# Altium PCB DB4100_DRV_v0.2.PcbDoc
Units mil, origin at the board's own origin, x right, y up, seen from the top; angles counter-clockwise.
Board outline 5511.81 x 8267.72 mil, 2 copper layers (Top Layer, Bottom Layer); 14 components, 75 nets, 42 pads, 2 vias.
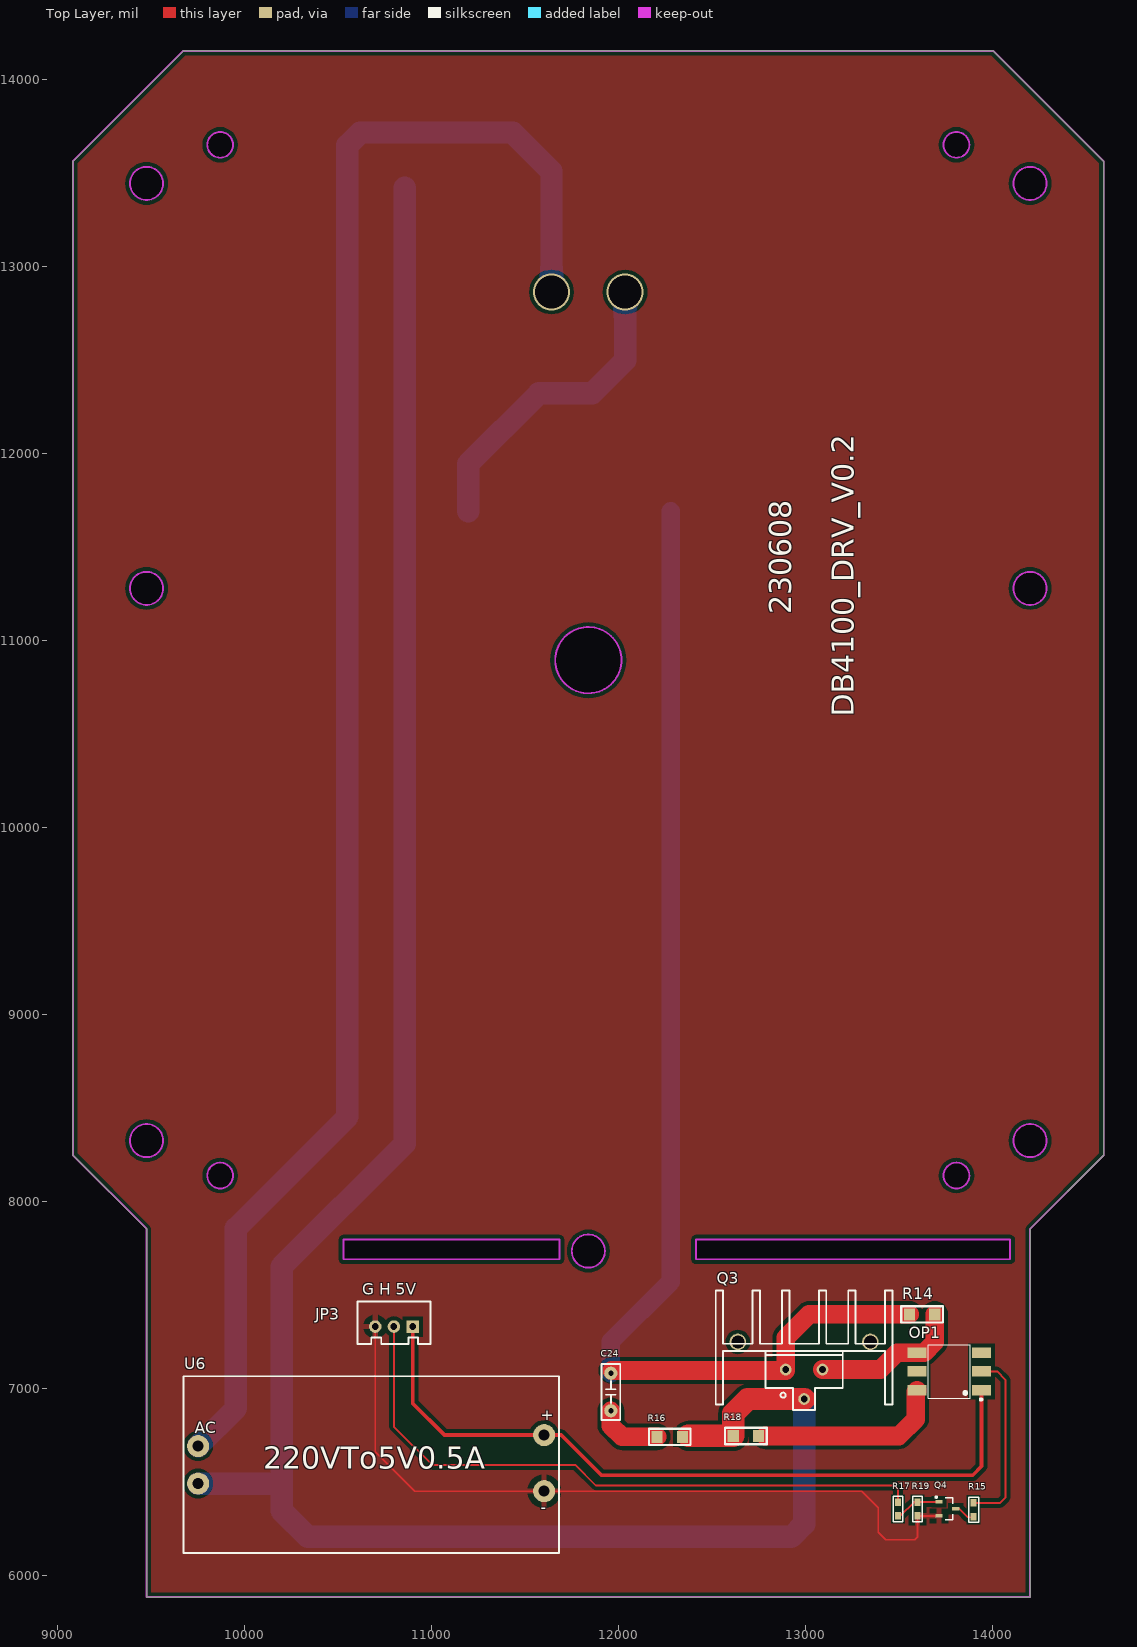
[diagram p0: Top Layer view]
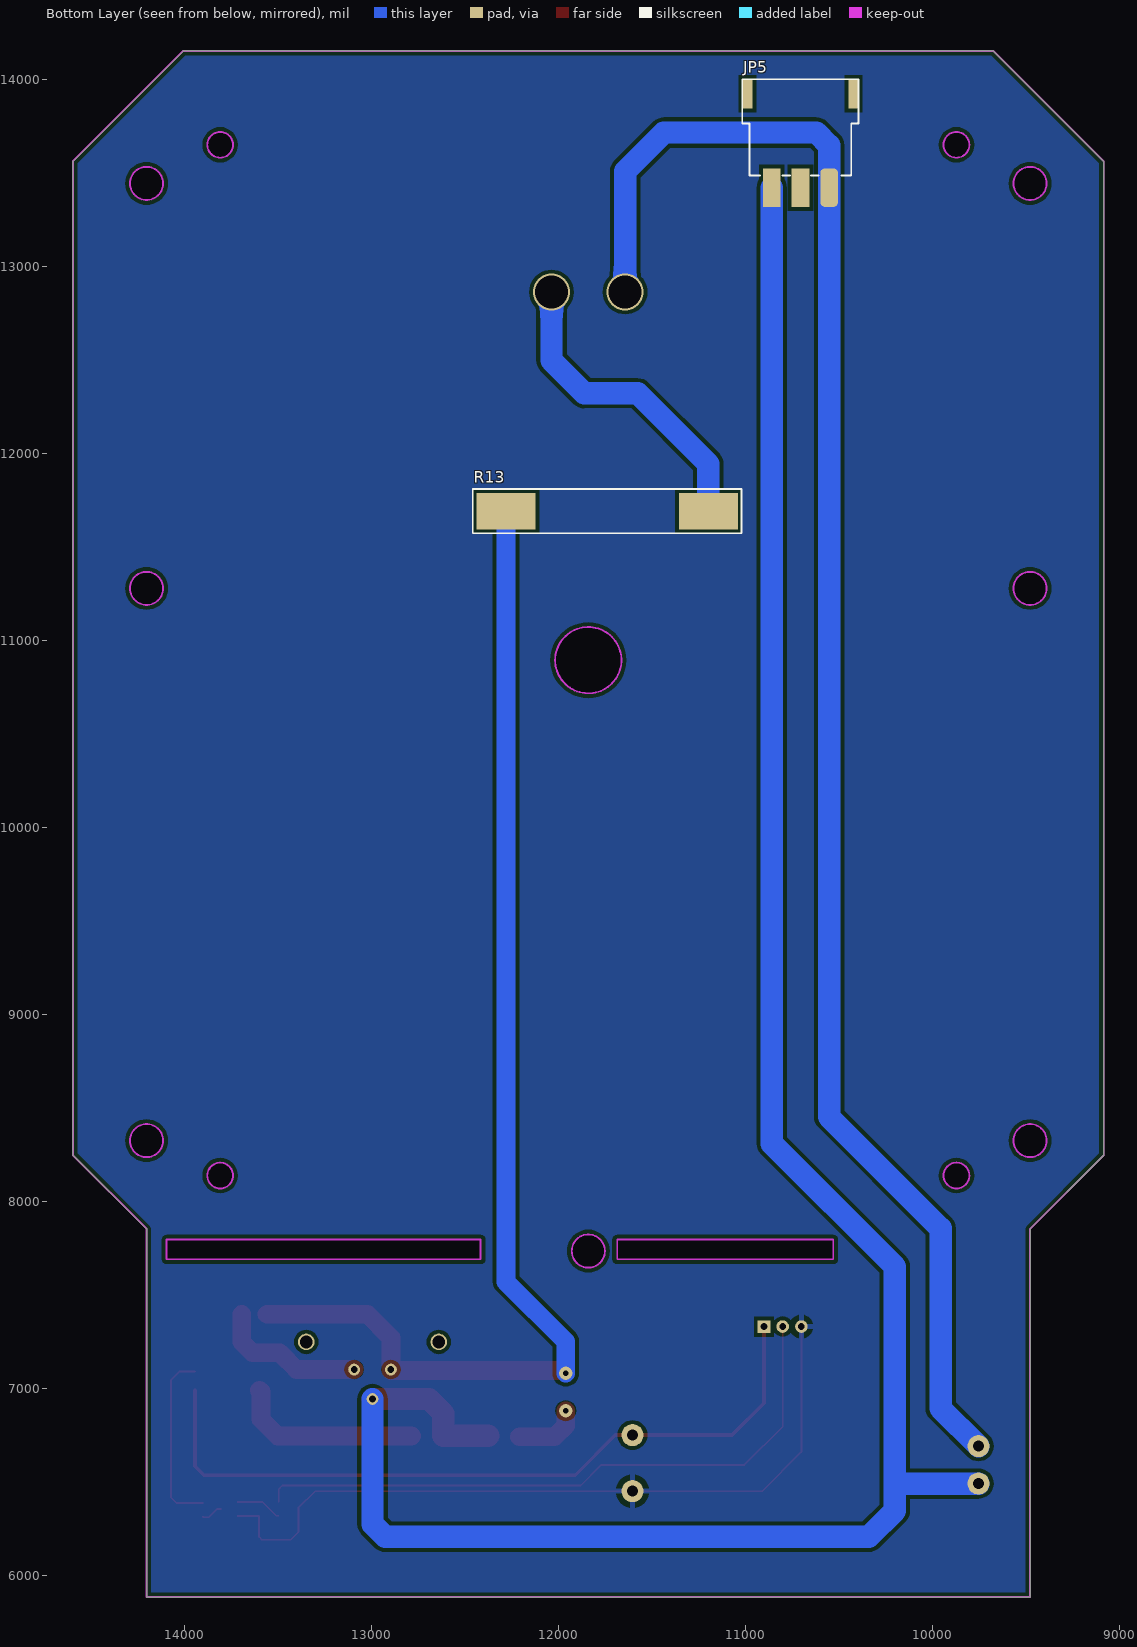
[diagram p1: Bottom Layer view, seen from below]
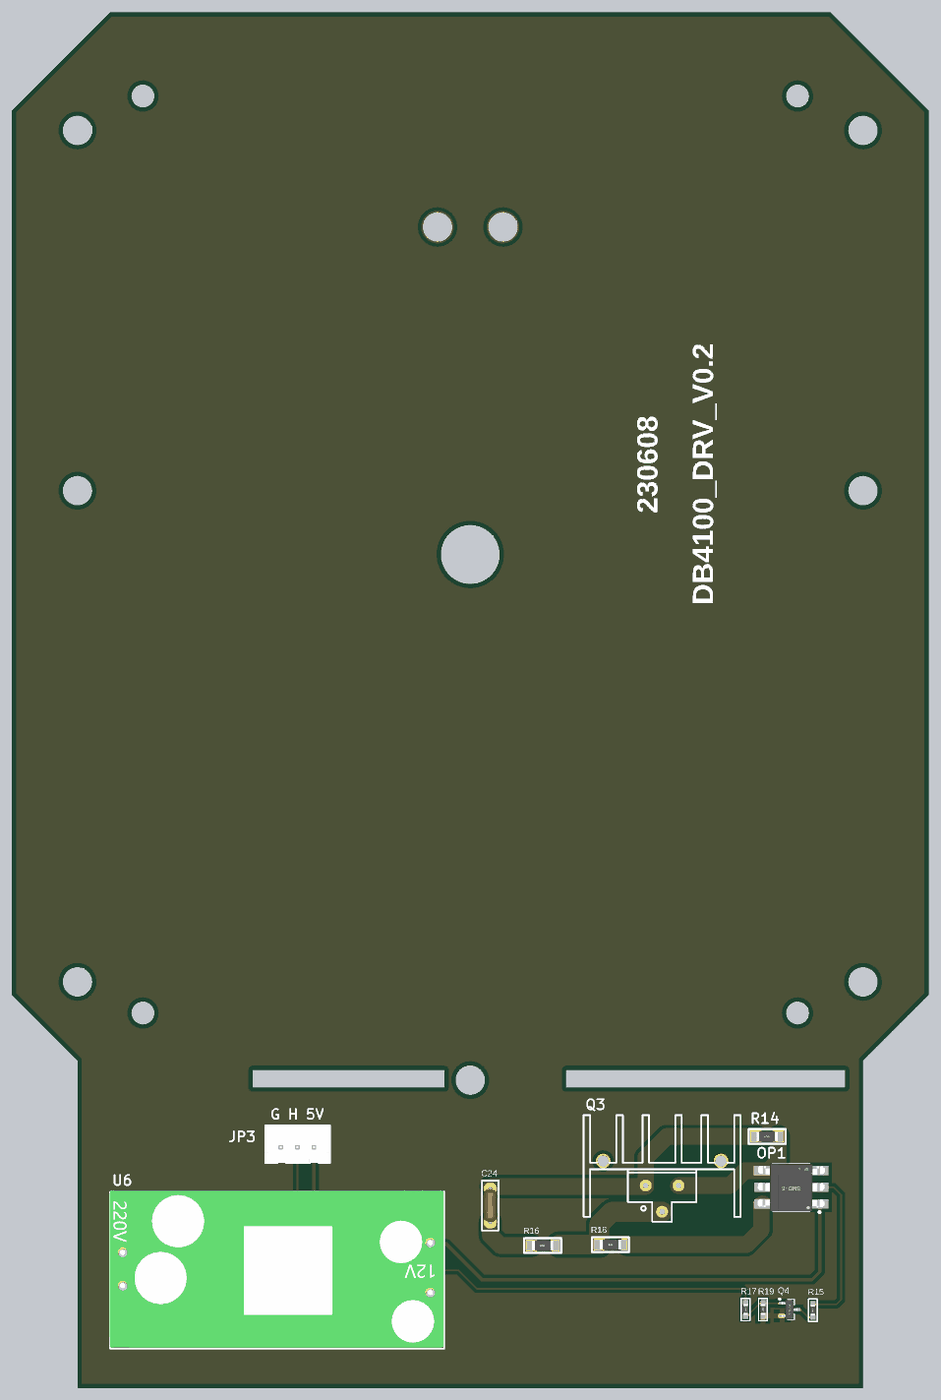
[diagram p2: 3D render of the assembled board from above, using the file's embedded part models]

## Layer stack, top to bottom
Top Solder: solder mask 0.4, Solder Resist, Dk 3.5
Top Layer: signal copper 1.4
Dielectric 1: dielectric 12.6, FR-4, Dk 4.8
Bottom Layer: signal copper 1.4
Bottom Solder: solder mask 0.4, Solder Resist, Dk 3.5

## Board outline
9477.26,5883.42 9477.26,7851.92 9083.56,8245.62 9083.56,13560.58 9674.11,14151.13 14004.82,14151.13 14595.37,13560.58 14595.37,8245.62 14201.67,7851.92 14201.67,5883.42
cut-out: 14113.09,8324.36 ccw(c14201.67,8324.36) 14201.67,8235.78 ccw(c14201.67,8324.36) 14290.25,8324.36 ccw(c14201.67,8324.36) 14201.67,8412.95 ccw(c14201.67,8324.36)
cut-out: 13739.07,8137.36 ccw(c13807.97,8137.36) 13807.97,8068.46 ccw(c13807.97,8137.36) 13876.86,8137.36 ccw(c13807.97,8137.36) 13807.97,8206.25 ccw(c13807.97,8137.36)
cut-out: 11750.88,7733.81 ccw(c11839.46,7733.81) 11839.46,7645.23 ccw(c11839.46,7733.81) 11928.05,7733.81 ccw(c11839.46,7733.81) 11839.46,7822.39 ccw(c11839.46,7733.81)
cut-out: 9802.06,8137.36 ccw(c9870.96,8137.36) 9870.96,8068.46 ccw(c9870.96,8137.36) 9939.86,8137.36 ccw(c9870.96,8137.36) 9870.96,8206.25 ccw(c9870.96,8137.36)
cut-out: 11662.3,10893.26 ccw(c11839.46,10893.26) 11839.46,10716.1 ccw(c11839.46,10893.26) 12016.63,10893.26 ccw(c11839.46,10893.26) 11839.46,11070.43 ccw(c11839.46,10893.26)
cut-out: 14113.09,11277.12 ccw(c14201.67,11277.12) 14201.67,11188.54 ccw(c14201.67,11277.12) 14290.25,11277.12 ccw(c14201.67,11277.12) 14201.67,11365.7 ccw(c14201.67,11277.12)
cut-out: 9477.26,11188.54 cw(c9477.26,11277.12) 9388.68,11277.12 cw(c9477.26,11277.12) 9477.26,11365.7 cw(c9477.26,11277.12) 9565.84,11277.12 cw(c9477.26,11277.12)
cut-out: 14113.09,13442.47 ccw(c14201.67,13442.47) 14201.67,13353.89 ccw(c14201.67,13442.47) 14290.25,13442.47 ccw(c14201.67,13442.47) 14201.67,13531.06 ccw(c14201.67,13442.47)
cut-out: 13739.07,13649.17 ccw(c13807.97,13649.17) 13807.97,13580.27 ccw(c13807.97,13649.17) 13876.86,13649.17 ccw(c13807.97,13649.17) 13807.97,13718.06 ccw(c13807.97,13649.17)
cut-out: 9870.96,13580.27 cw(c9870.96,13649.17) 9802.06,13649.17 cw(c9870.96,13649.17) 9870.96,13718.06 cw(c9870.96,13649.17) 9939.86,13649.17 cw(c9870.96,13649.17)
cut-out: 9477.26,13353.89 cw(c9477.26,13442.47) 9388.68,13442.47 cw(c9477.26,13442.47) 9477.26,13531.06 cw(c9477.26,13442.47) 9565.84,13442.47 cw(c9477.26,13442.47)
cut-out: 9477.26,8235.78 ccw(c9477.26,8324.36) 9565.84,8324.36 ccw(c9477.26,8324.36) 9477.26,8412.95 ccw(c9477.26,8324.36) 9388.68,8324.36 ccw(c9477.26,8324.36)
cut-out: 12415,7690 12415,7795 14095,7795 14095,7690
cut-out: 10530,7690 10530,7795 11685,7795 11685,7690

## Design rules (kind name [scope] priority, off if disabled: settings)
Clearance [All] p1: gap=20 ignorepadtopadclearanceinfootprint=FALSE
PlaneClearance [All] p1: clearance=60
PlaneConnect [All] p1: planeconnectstyle=Relief reliefexpansion=60 reliefentries=4 reliefconductorwidth=30 reliefairgap=30
PolygonConnect [All] p1: connectstyle=Relief reliefconductorwidth=30 reliefentries=4 polygonreliefangle="90 Angle" airgapwidth=30
RoutingVias [All] p1: holewidth=28 width=50 viastyle="Through Hole" minholewidth=28 minwidth=50 maxholewidth=28 maxwidth=50
SolderMaskExpansion [All] p1: expansion=4
Width [All] p1: maxlimit=120 minlimit=10 preferedwidth=10
28 further rules are at their usual default settings.

## Components (designator, comment, footprint, x,y, rotation, side; value= is the part's Value field where it differs from the comment)
C24 "0.01uF" MLCC5.08-A 11960,6980 r90 top
JP3 "HDR-1X3" XH2.54-3P 10900,7330 r180 top
JP5 "HDR-1X3" VH3.96-3PWB 10976.65,13485 r180 bottom
OP1 "MOC3063" MOC3063 13770,7095 r180 top
Q3 "BT138-600E,127" BT138-600E,127 12520.98,6912.99 r0 top
Q4 "S8050" SOT23-3L 13760,6355 r270 top
R13 "RS-03" RS-03 12457.17,11571.89 r180 bottom
R14 "360R" "R 1206" 13625,7395 r180 top
R15 "470R" "R 0603" 13900,6350.5 r90 top
R16 "39R" "R 1206" 12275,6740 r180 top
R17 "1K" "R 0603" 13495,6355 r270 top
R18 "360R" "R 1206" 12682.5,6745 r180 top
R19 "10K" "R 0603" 13600,6355 r90 top
U6 "AC_To_5V" ACTo5v 9674.11,6119.64 r0 top

## Footprints (in the part's own frame and the unit in brackets; to place one, negate y for a bottom-side part, rotate by r counter-clockwise, add the part's x,y. Pads: shape width x height; smd on the part's side, far side on the other; paste and mask are expansions set on the pad)
ACTo5v [mm] "ACת5V"
  round 3 hole 1.5: 1(2,14.5) 2(2,9.42) 3(49,16) 4(49,8.38)
  silkscreen extent 0,0 51,24, body extent -0.1,0.19 50.9,24.19, height 16.3
BT138-600E,127 [mm] "晶闸管(可控硅)/模块"
  round 2.25 hole 1.75: 0(3,8.5) 0(21,8.5)
  round 1.6 hole 0.9: 1(9.5,4.75) 2(12,0.75) 3(14.5,4.75)
  silkscreen extent 0,-0.75 24,15.5
MLCC5.08-A [mm] "独石电容，脚距5.08mm"
  round 1.8 hole 0.7: 1(-2.54,0) 2(2.54,0)
  silkscreen extent -3.81,-1.27 3.81,1.27, body extent -2.79,-1 2.79,1, height 3.71
MOC3063 [mil] "双向可控硅"
  rect 102.36x56 smd paste+0 mask+2: 1(-172.44,105) 2(-172.44,5) 3(-172.44,-95) 4(172.44,-95) 5(172.44,5) 6(172.44,105)
  silkscreen extent -176,-139 112,161, body extent -202,-140 202,150, height 154
"R 0603" [mil] "1/10W贴片电阻"
  rect 40x31.5 smd: 1(-36.5,0) 2(36.5,0)
  silkscreen extent -68,-26 68,26, body extent -31,-16 32,16, height 16
"R 1206" [mil] "1/4W贴片电阻"
  rect 60x62.99 smd: 1(-67.5,0) 2(67.5,0)
  silkscreen extent -112,-44 112,44, body extent -63,-31 63,32, height 22
RS-03 [mm] "电吹风热保护器"
  rect 8x5 smd: 1(4.5,3) 2(32,3)
  silkscreen extent 0,0 36.5,6, body extent 1.13,0.2 35.13,6, height 4.2
SOT23-3L [mm] "3x1.3x1mm(长宽高)"
  rect 0.45x1 smd: 1(-0.95,-1.143) 2(0.95,-1.143) 3(0,1.125)
  silkscreen extent -1.72,-1.65 1.5,0.7, body extent -1.5,-1.2 1.5,1.2, height 1.05
VH3.96-3PWB [mm] "3.96卧式"
  rect 1.4x4 smd paste+0 mask+0.051: 0(-0.3,11.081) 0(14.1,11.081)
  rrect50% 2.4x5.2 smd paste+0 mask+0.051: 1(10.8,-1.651)
  rect 2.4x5.2 smd paste+0 mask+0.051: 2(6.9,-1.651) 3(3,-1.651)
  silkscreen extent -1,0 14.8,13.08, body extent -0.89,-2.25 14.87,12.95, height 9.6
XH2.54-3P [mm] "接插件，3P"
  rect 1.7x1.7 hole 0.9: 1(0,0)
  round 1.7 hole 0.9: 2(2.54,0) 3(5.08,0)
  silkscreen extent -2.41,-3.38 7.47,2.39, body extent -2.5,-3.3 7.58,2.4, height 7.03

## Part data
C24: library part C-MLCC, "独石电容"
JP3 JP5: library part "Header 3", "3P接插件"
OP1: "双向可控硅"
Q3: "晶闸管(可控硅)/模块"
Q4: library part NPN
R13: "电吹风热保护器"
R14 R15 R16 R17 R18 R19: library part R, "贴片电阻"
U6: "220V转5V降压模块"

## Via types
v1: diameter 196.85, hole 177.17, Top Layer to Bottom Layer, 2 vias

## Nets (pads, with @x,y where several pads share a name; then routed paths per layer and width w, separated by ;. In a path a pad name is that pad's centre, name@x,y a point inside that pad or via, vN(x,y) a via of type N, cw(c..) or ccw(c..) an arc to the next point about the centre after c; other vN are vias at no path point)
3.3V: 
5V: JP3.1 OP1.1 U6.3 | length 4039.1
  Top Layer w20: JP3.1 10900,6920 11070.44,6749.56 U6.3 11694.9,6749.56 11909.46,6535 13895,6535 13942.44,6582.44 OP1.1
5V_IN: 
AD_T1: 
Beep: 
COM1: 
COM2: 
COM3: 
COM4: 
COM5: 
COM6: 
COM7: 
COM8: 
CS: 
DGND: 
EGND: 
GND: JP3.3 Q4.2 R19.1 U6.4 | length 4075.9
  Top Layer w10: JP3.3 10700,6660 10910.44,6449.56 U6.4 13300.44,6449.56 13390,6360 13390,6230 13430,6190 13585,6190 13600,6205 R19.1 13600.9,6317.6 Q4.2
HEAT: JP3.2 R17.1 | length 3437.3
  Top Layer w10: JP3.2 10800,6795 11005,6590 11770,6590 11880,6480 13475,6480 13495,6460 R17.1
K1: 
K2: 
K3: 
K4: 
K5: 
L: JP5.1 U6.1 | length 9137.9
  Bottom Layer w120: U6.1 9955,6892.66 9955,7855 10551.46,8451.46 10551.46,9641.46 JP5.1 10551.46,13646.46 10620,13715 11435,13715 11642.6,13507.4 v1(11642.6,12861.77)
L_IN: 
LED_ADJ: 
N: JP5.3 Q3.2 R16.1 R18.2 U6.2 | length 12114.3
  Top Layer w120: 12375,6745 R18.2 12615,6865 12692.52,6942.52 Q3.2
  Bottom Layer w120: U6.2 10200,6490.5 ; JP5.3 10858.54,8308.54 10200,7650 10200,6490.5 ; Q3.2 12993.43,6273.43 12925,6205 10340,6205 10200,6345 10200,6490.5
NetB1_2: 
NetC11_2: 
NetC24_1: C24.1 R16.2 | length 352.4
  Top Layer w100: C24.1 11960,6800 12020,6740 R16.2
NetC24_2: C24.2 Q3.1 R13.1 R14.2 | length 6556.8
  Top Layer w100: C24.2@11965,7095 Q3.1@12895,7095 ; Q3.1 12895,7270 13020,7395 R14.2
  Bottom Layer w100: C24.2 11960,7250 12280,7570 R13.1
NetOP1_2: OP1.2 R15.2 | length 957.8
  Top Layer w10: R15.2 14042,6387 14070,6415 14070,7045 14025,7090 OP1.2
NetOP1_4: OP1.4 Q3.3 R14.1 | length 809.2
  Top Layer w100: Q3.3 13400,7100 13490,7190 OP1.4 13635,7190 13692.5,7247.5 R14.1
NetOP1_6: OP1.6 R18.1 | length 1000.4
  Top Layer w100: 12785,6745 13500,6745 13590,6835 13590,6982.44 OP1.6
NetQ1_1: 
NetQ2_1: 
NetQ4_1: Q4.1 R17.2 R19.2 | length 250.6
  Top Layer w10: R17.2 13508.5,6318.5 13581.5,6391.5 R19.2 13600.9,6392.4 Q4.1
NetQ4_3: Q4.3 R15.1 | length 116
  Top Layer w10: Q4.3 13824,6355 13869,6310 13896,6310 R15.1
NetR7_2: 
NRST: 
OSC_IN: 
OSC_OUT: 
OUT_N: R13.2 | length 1686.2
  Bottom Layer w120: R13.2 11197.32,11942.32 11575,12320 11860,12320 12036.3,12496.3 v1(12036.3,12861.77)
RD: 
SEG1: 
SEG2: 
SEG3: 
SEG4: 
SEG5: 
SEG6: 
SEG7: 
SEG8: 
SEG9: 
SEG10: 
SEG11: 
SEG12: 
SEG13: 
SEG14: 
SEG15: 
SEG16: 
SEG17: 
SEG18: 
SEG19: 
SEG20: 
SEG21: 
SEG22: 
SEG23: 
SEG24: 
SEG25: 
SEG26: 
SEG27: 
SWCLK: 
SWDIO: 
VLED+: 
WR: 
pads on no net: JP5.0 JP5.2 OP1.3 OP1.5 Q3.0

## Polygon pours and split planes (outlines as drawn)
GND on Top Layer "N_L01_P000" (solid, remove dead copper, pour order 0): 9477.26,5883.42 9477.26,7851.92 9083.56,8245.62 9083.56,13560.58 9674.11,14151.13 14004.82,14151.13 14595.37,13560.58 14595.37,8245.62 14201.67,7851.92 14201.67,5883.42
GND on Bottom Layer "N_L02_P001" (solid, remove dead copper, pour order 1): 9477.26,5883.42 9477.26,7851.92 9083.56,8245.62 9083.56,13560.58 9674.11,14151.13 14004.82,14151.13 14595.37,13560.58 14595.37,8245.62 14201.67,7851.92 14201.67,5883.42

## Keep-outs
Keep-Out Layer:
  circle w10: c9870.96,8137.36 r68.9
  circle w10: c11839.46,10893.26 r177.17
  circle w10: c13807.97,8137.36 r68.9
  circle w10: c13807.97,13649.17 r68.9
  circle w10: c9870.96,13649.17 r68.9
  circle w10: c14201.67,11277.12 r88.58
  circle w10: c14201.67,13442.47 r88.58
  circle w10: c11839.46,7733.81 r88.58
  circle w10: c14201.67,8324.36 r88.58
  circle w10: c9477.26,8324.36 r88.58
  circle w10: c9477.26,11277.12 r88.58
  circle w10: c9477.26,13442.47 r88.58
  lines w10: 9083.56,8245.62 9477.26,7851.92 9477.26,5883.42 14201.67,5883.42 14201.67,7851.92 14595.37,8245.62 14595.37,13560.58 14004.82,14151.13 9674.11,14151.13 9083.56,13560.58 9083.56,8245.62 ; 10530,7690 11685,7690 11685,7795 10530,7795 10530,7690 ; 12415,7690 12415,7795 14095,7795 14095,7690 12415,7690

## Silkscreen, mask and mechanical layers (free items; w line width, h text height)
Top Overlay:
  text "230608" at 12965,11140 h200 r90
  text "DB4100_DRV_V0.2" at 13300,10590 h200 r90
  text "G H 5V" at 10630,7500 h60
  text "220VTo5V0.5A" at 10100,6530 h200

## Text inside footprints (layer, text, board x,y; h text height)
U6: Top Overlay "AC" at 9735,6760 h60; Top Overlay "-" at 11585,6335 h60; Top Overlay "+" at 11585,6829.64 h60